# EAGLE board bk-cir4 (EAGLE 9.1.0)
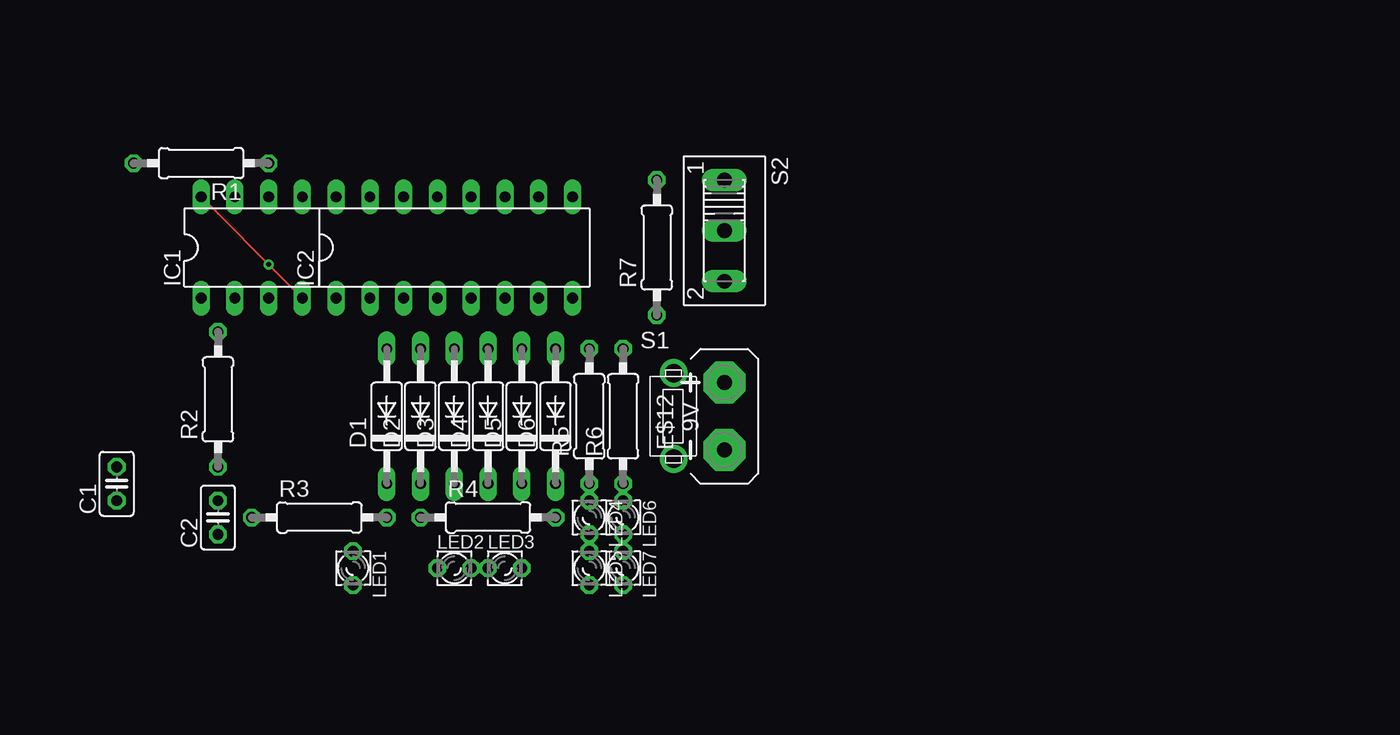
[diagram p0: board, top side]
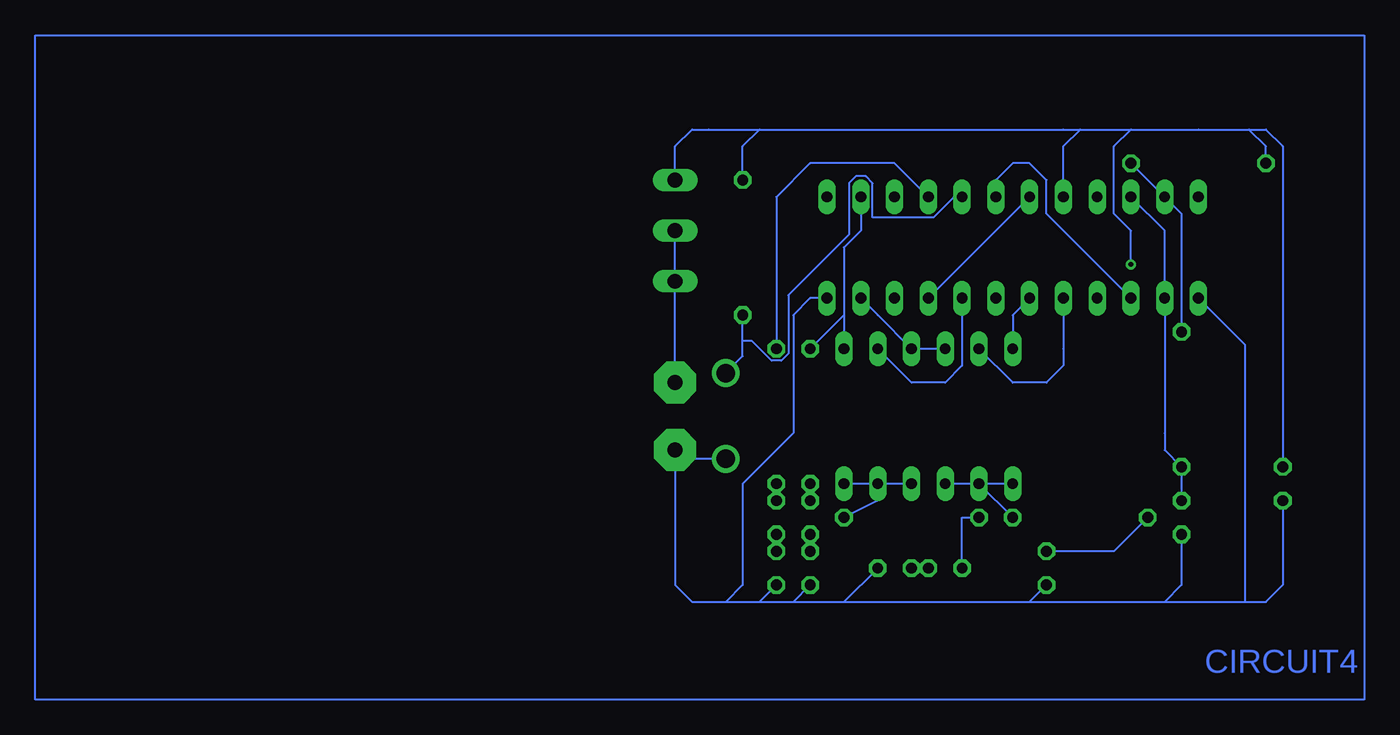
[diagram p1: board, bottom side, seen from below]

No outline drawn. Coordinates in mm, seen from the top.
Copper layers (1*16): Top 0.035mm / dielectric 1.5mm / Bottom 0.035mm
Design rules "default": minimum track width 6mil, minimum drill 0.35mm, track to track 6mil, track to pad 6mil, pad to pad 6mil, via to via 6mil, smd to smd 6mil, copper to edge 40mil, drill to drill 6mil, minimum pad ring 10mil, minimum via ring 8mil, stop-mask expansion 4mil, vias tented up to drill 0mil, thermal gap 10mil

## Footprints (pad centres in the part's own frame; a part is rotated, then mirrored left to right if it is on the bottom)
C025-025X050 = drill 0.813 octagon: 1 -1.27,0; 2 1.27,0
C2992 = drill 0.813 long: A 5.08,0; C -5.08,0
AB9V = drill 1.118 pad 3.15 octagon: + 0,2.54; - 0,-2.54
DIL08 = drill 0.813 long: 1 -3.81,-3.81; 2 -1.27,-3.81; 3 1.27,-3.81; 4 3.81,-3.81; 5 3.81,3.81; 6 1.27,3.81; 7 -1.27,3.81; 8 -3.81,3.81
DIL16 = drill 0.813 long: 1 -8.89,-3.81; 2 -6.35,-3.81; 3 -3.81,-3.81; 4 -1.27,-3.81; 5 1.27,-3.81; 6 3.81,-3.81; 7 6.35,-3.81; 8 8.89,-3.81; 9 8.89,3.81; 10 6.35,3.81; 11 3.81,3.81; 12 1.27,3.81; 13 -1.27,3.81; 14 -3.81,3.81; 15 -6.35,3.81; 16 -8.89,3.81
LZR181 = drill 0.813 octagon: A -1.27,0; K 1.27,0
0207/10 = drill 0.813 octagon: 1 -5.08,0; 2 5.08,0
FSM = drill 1.397: P$1 0,3.25; P$2 0,-3.2
255SB = drill 1.118 long: 1 -3.81,0; 2 0,0; 3 3.81,0

## Placement (x,y rotation side)
C1  0.1uF  [C025-025X050]  6.13,16.24 90 top
C2  0.01uF  [C025-025X050]  13.75,13.7 90 top
D1  [C2992]  26.45,21.32 90 top
D2  [C2992]  28.99,21.32 90 top
D3  [C2992]  31.53,21.32 90 top
D4  [C2992]  34.07,21.32 90 top
D5  [C2992]  36.61,21.32 90 top
D6  [C2992]  39.15,21.32 90 top
E$12  [AB9V]  51.85,21.32 0 top
IC1  [DIL08]  16.29,34.02 0 top
IC2  [DIL16]  31.53,34.02 0 top
LED1  [LZR181]  23.91,9.89 270 top
LED2  [LZR181]  31.53,9.89 0 top
LED3  [LZR181]  35.34,9.89 0 top
LED4  [LZR181]  41.69,13.7 270 top
LED5  [LZR181]  41.69,9.89 270 top
LED6  [LZR181]  44.23,13.7 270 top
LED7  [LZR181]  44.23,9.89 270 top
R1  1Ok  [0207/10]  12.48,40.37 180 top
R2  10k  [0207/10]  13.75,22.59 90 top
R3  470  [0207/10]  21.37,13.7 0 top
R4  330  [0207/10]  34.07,13.7 0 top
R5  330  [0207/10]  41.69,21.32 90 top
R6  330  [0207/10]  44.23,21.32 90 top
R7  10k  [0207/10]  46.77,34.02 90 top
S1  [FSM]  48.04,21.32 0 top
S2  [255SB]  51.85,35.29 270 top

## Library data of the parts
C1 C2 R1-R7 = resistor
D1-D6 = diode
E$12 = battery
IC1 IC2 = ic-package
LED1-LED7 = led
S1 = switch-misc
S2 = switch

## Nets
S$1: IC2.12 R6.2
S$2: IC2.5 IC2.15
S$3: D1.A IC2.2
S$4: D2.A IC2.1
S$5: D3.A D4.A IC2.7
S$6: D5.A IC2.4
S$7: D6.A IC2.10 R5.2
S$8: D1.C D2.C D3.C R3.2
S$9: D4.C D5.C D6.C R4.2
S$10: LED4.K LED5.A
S$11: LED6.K LED7.A
S$12: LED2.K LED3.A
S$13: LED2.A R4.1
S$14: LED1.A R3.1
S$15: LED4.A R5.1
S$16: LED6.A R6.1
S$17: IC2.13 R7.1 S1.P$1
S$18: C2.2 IC1.2 IC1.6 R2.1
S$19: IC1.7 R1.1 R2.2
S$20: IC1.3 IC2.14
S$21: E$12.+ S2.2 S2.3
S$23: C1.1 C2.1 E$12.- IC1.1 IC2.8 LED1.K LED3.K LED5.K LED7.K S1.P$2
S$25: C1.2 IC1.4 IC1.8 IC2.16 R1.2 R7.2 S2.1

## Tracks (layer width: path | path; a pad name or v marks a point on that pad's centre or on a via)
S$1
  Bottom 0.152: IC2.12 35.34,40.37 41.69,40.37 44.23,37.83 R6.2
S$2
  Bottom 0.152: IC2.15 IC2.5
S$3
  Bottom 0.152: D1.A 26.45,28.94 IC2.2
S$4
  Bottom 0.152: IC2.1 22.64,26.4 22.64,25.13 23.91,23.86 26.45,23.86 D2.A
S$5
  Bottom 0.152: D3.A D4.A 36.61,28.94 IC2.7
S$6
  Bottom 0.152: IC2.4 30.26,25.13 31.53,23.86 34.07,23.86 D5.A
S$7
  Bottom 0.152: IC2.10 37.88,35.29 39.15,34.02 39.15,28.94 | 39.15,28.94 D6.A | 39.15,28.94 R5.2
S$8
  Bottom 0.152: D1.C D2.C | D2.C 30.26,16.24 D3.C | D2.C R3.2
S$9
  Bottom 0.152: D4.C D5.C | D5.C 37.88,16.24 D6.C | D5.C 36.61,14.97 R4.2
S$10
  Bottom 0.152: LED5.A LED4.K
S$12
  Bottom 0.152: LED3.A LED2.K
S$13
  Bottom 0.152: LED2.A 30.26,13.7 R4.1
S$14
  Bottom 0.152: R3.1 18.83,11.16 LED1.A
S$15
  Bottom 0.152: LED4.A R5.1
S$16
  Bottom 0.152: LED6.A R6.1
S$17
  Bottom 0.152: 46.77,27 46.77,25.84 S1.P$1 | 46.77,27 R7.1 | IC2.13 30.88,37.83 32.43,36.28 36.99,36.28 36.99,38.86 37.51,39.38 38.25,39.38 38.77,38.86 38.77,35 43.34,30.43 43.34,26.03 43.86,25.51 44.6,25.51 46.09,27 46.77,27
S$18
  Bottom 0.152: IC1.6 15.02,35.29 IC1.2 15.02,20.05 15.02,18.78 R2.1 C2.2
S$19
  Bottom 0.152: R1.1 IC1.7 13.75,36.56 R2.2
S$20
  Bottom 0.152: IC2.14 27.72,39.1 26.45,40.37 25.18,40.37 23.91,39.1 23.91,36.56 IC1.3
S$21
  Bottom 0.152: E$12.+ S2.3 S2.2
S$23
  Bottom 0.152: S1.P$2 51.19,18.12 E$12.- 51.85,8.62 50.58,7.35 48.04,7.35 | IC2.8 41.69,30.21 42.96,28.94 42.96,20.05 46.77,16.24 46.77,8.62 48.04,7.35 | 48.04,7.35 46.77,7.35 45.5,7.35 | 45.5,7.35 42.96,7.35 | 42.96,7.35 39.15,7.35 | 39.15,7.35 25.18,7.35 | 25.18,7.35 15.02,7.35 | 15.02,7.35 9,7.35 | 9,7.35 7.4,7.35 6.13,8.62 C1.1 | LED1.K 25.18,7.35 | LED3.K 39.15,7.35 | LED5.K 42.96,7.35 | LED7.K 45.5,7.35 | C2.1 13.75,8.62 15.02,7.35 | IC1.1 9,26.73 9,7.35
S$25  (via drill 0.35)
  Top 0.152: IC1.8 13.75,36.56 v17.56,32.75 IC1.4
  Bottom 0.152: R1.2 7.4,41.64 8.67,42.91 | v17.56,32.75 17.56,35.29 18.83,36.56 18.83,41.64 17.56,42.91 | IC2.16 22.64,41.64 21.37,42.91 | R7.2 46.77,41.64 45.5,42.91 | S2.1 51.85,41.64 50.58,42.91 49.31,42.91 45.5,42.91 | 45.5,42.91 22.64,42.91 21.37,42.91 | 21.37,42.91 17.56,42.91 | 17.56,42.91 12.48,42.91 8.67,42.91 | 8.67,42.91 7.4,42.91 6.13,41.64 C1.2
S$26
  Bottom 0.152: 0,0 100,0 100,50 0,50 0,0

## Text on the board
Bottom: CIRCUIT4